# Allegro board AC7K325B.brd
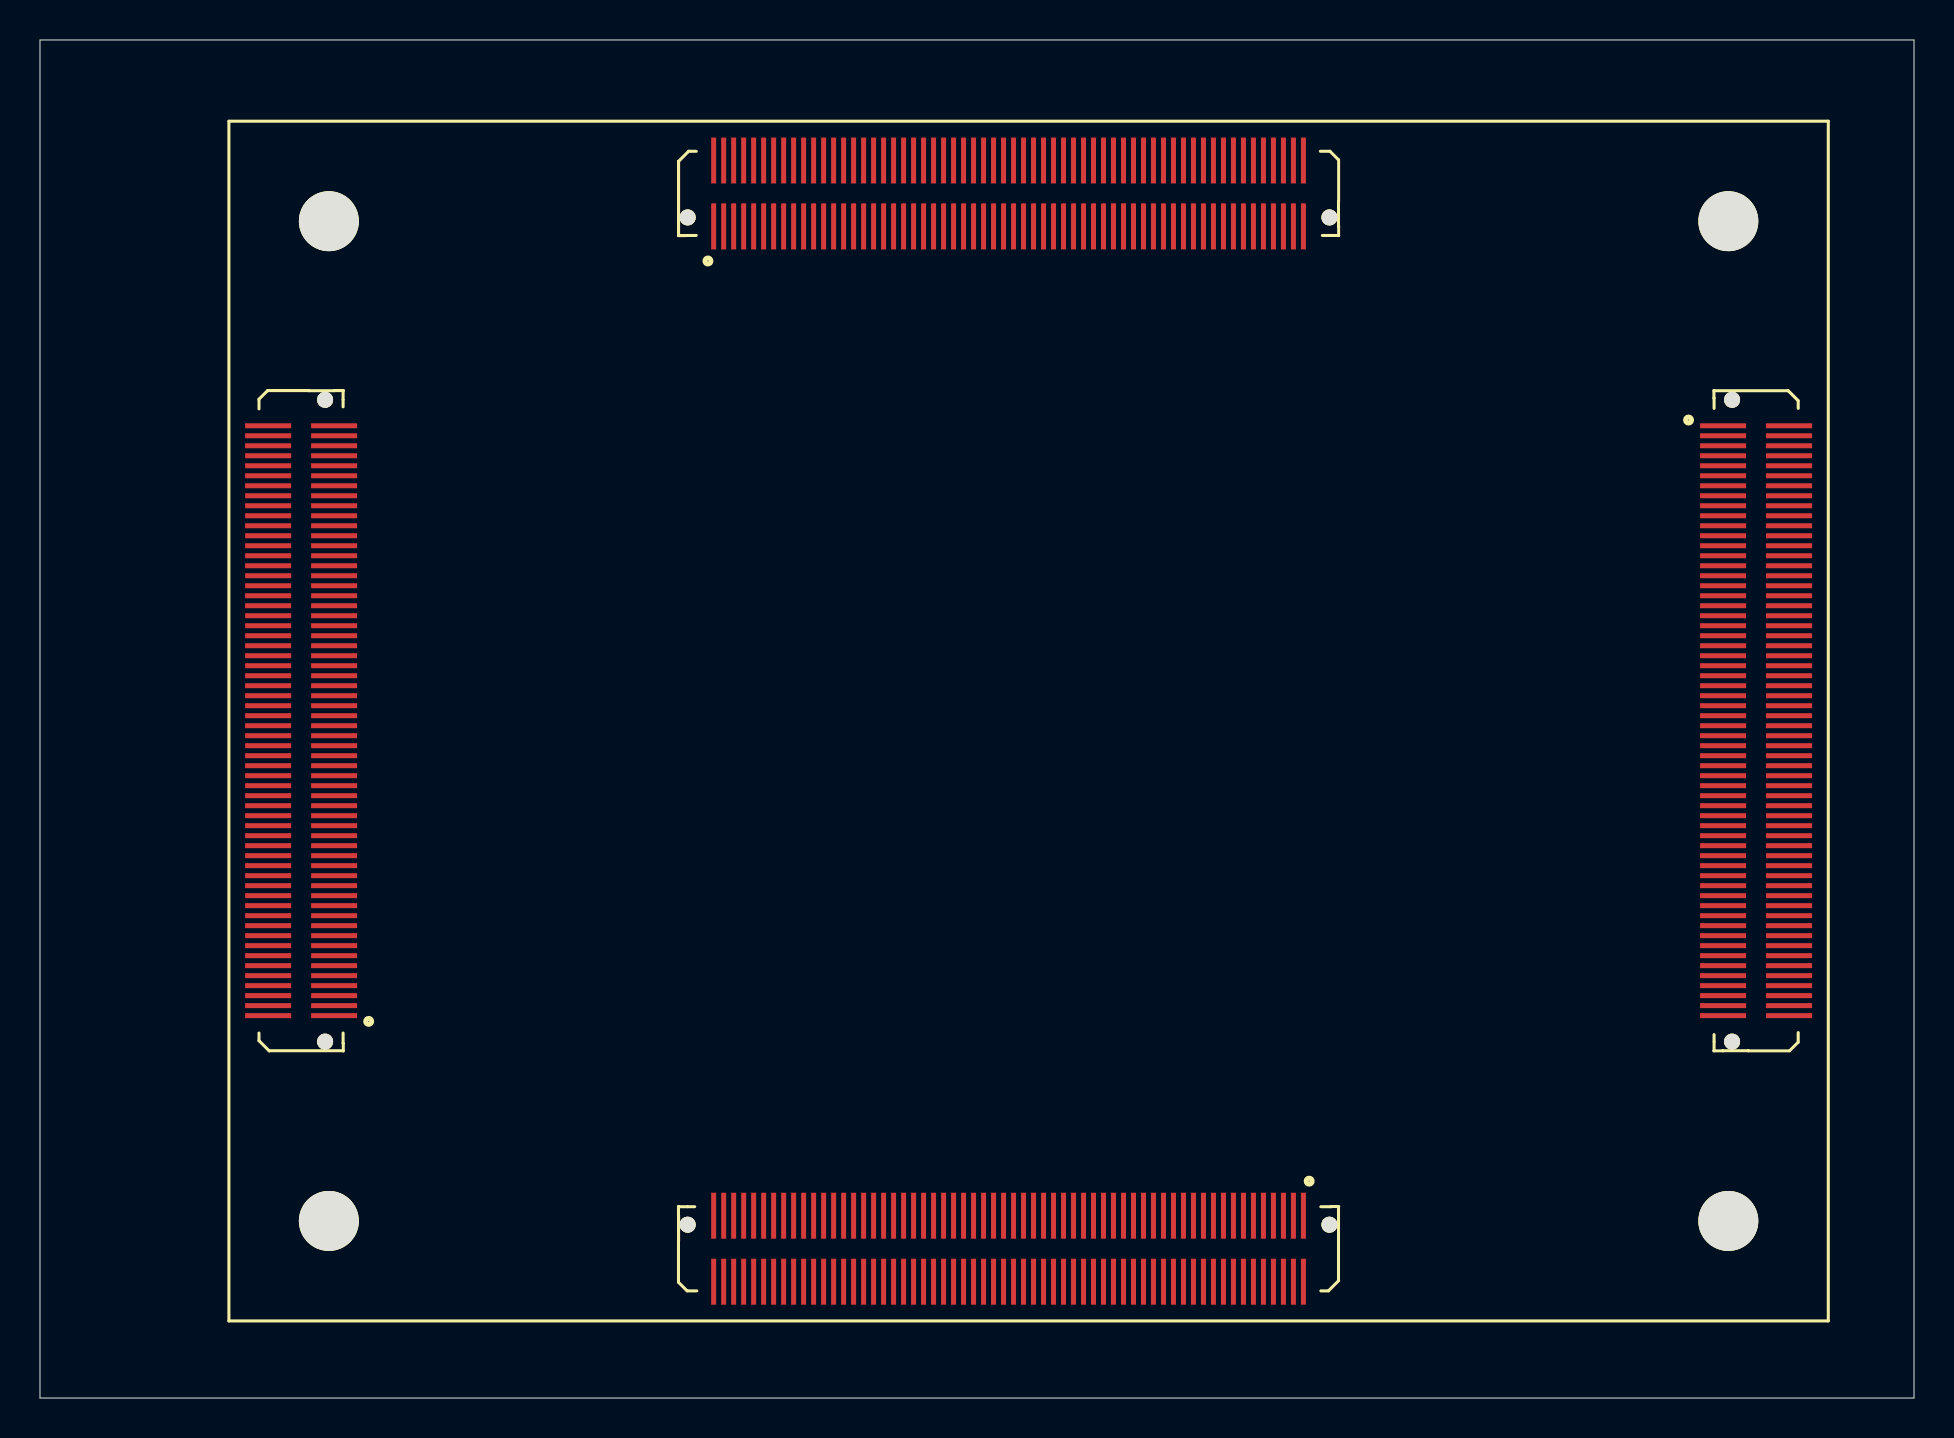
[diagram p0: board, top side]
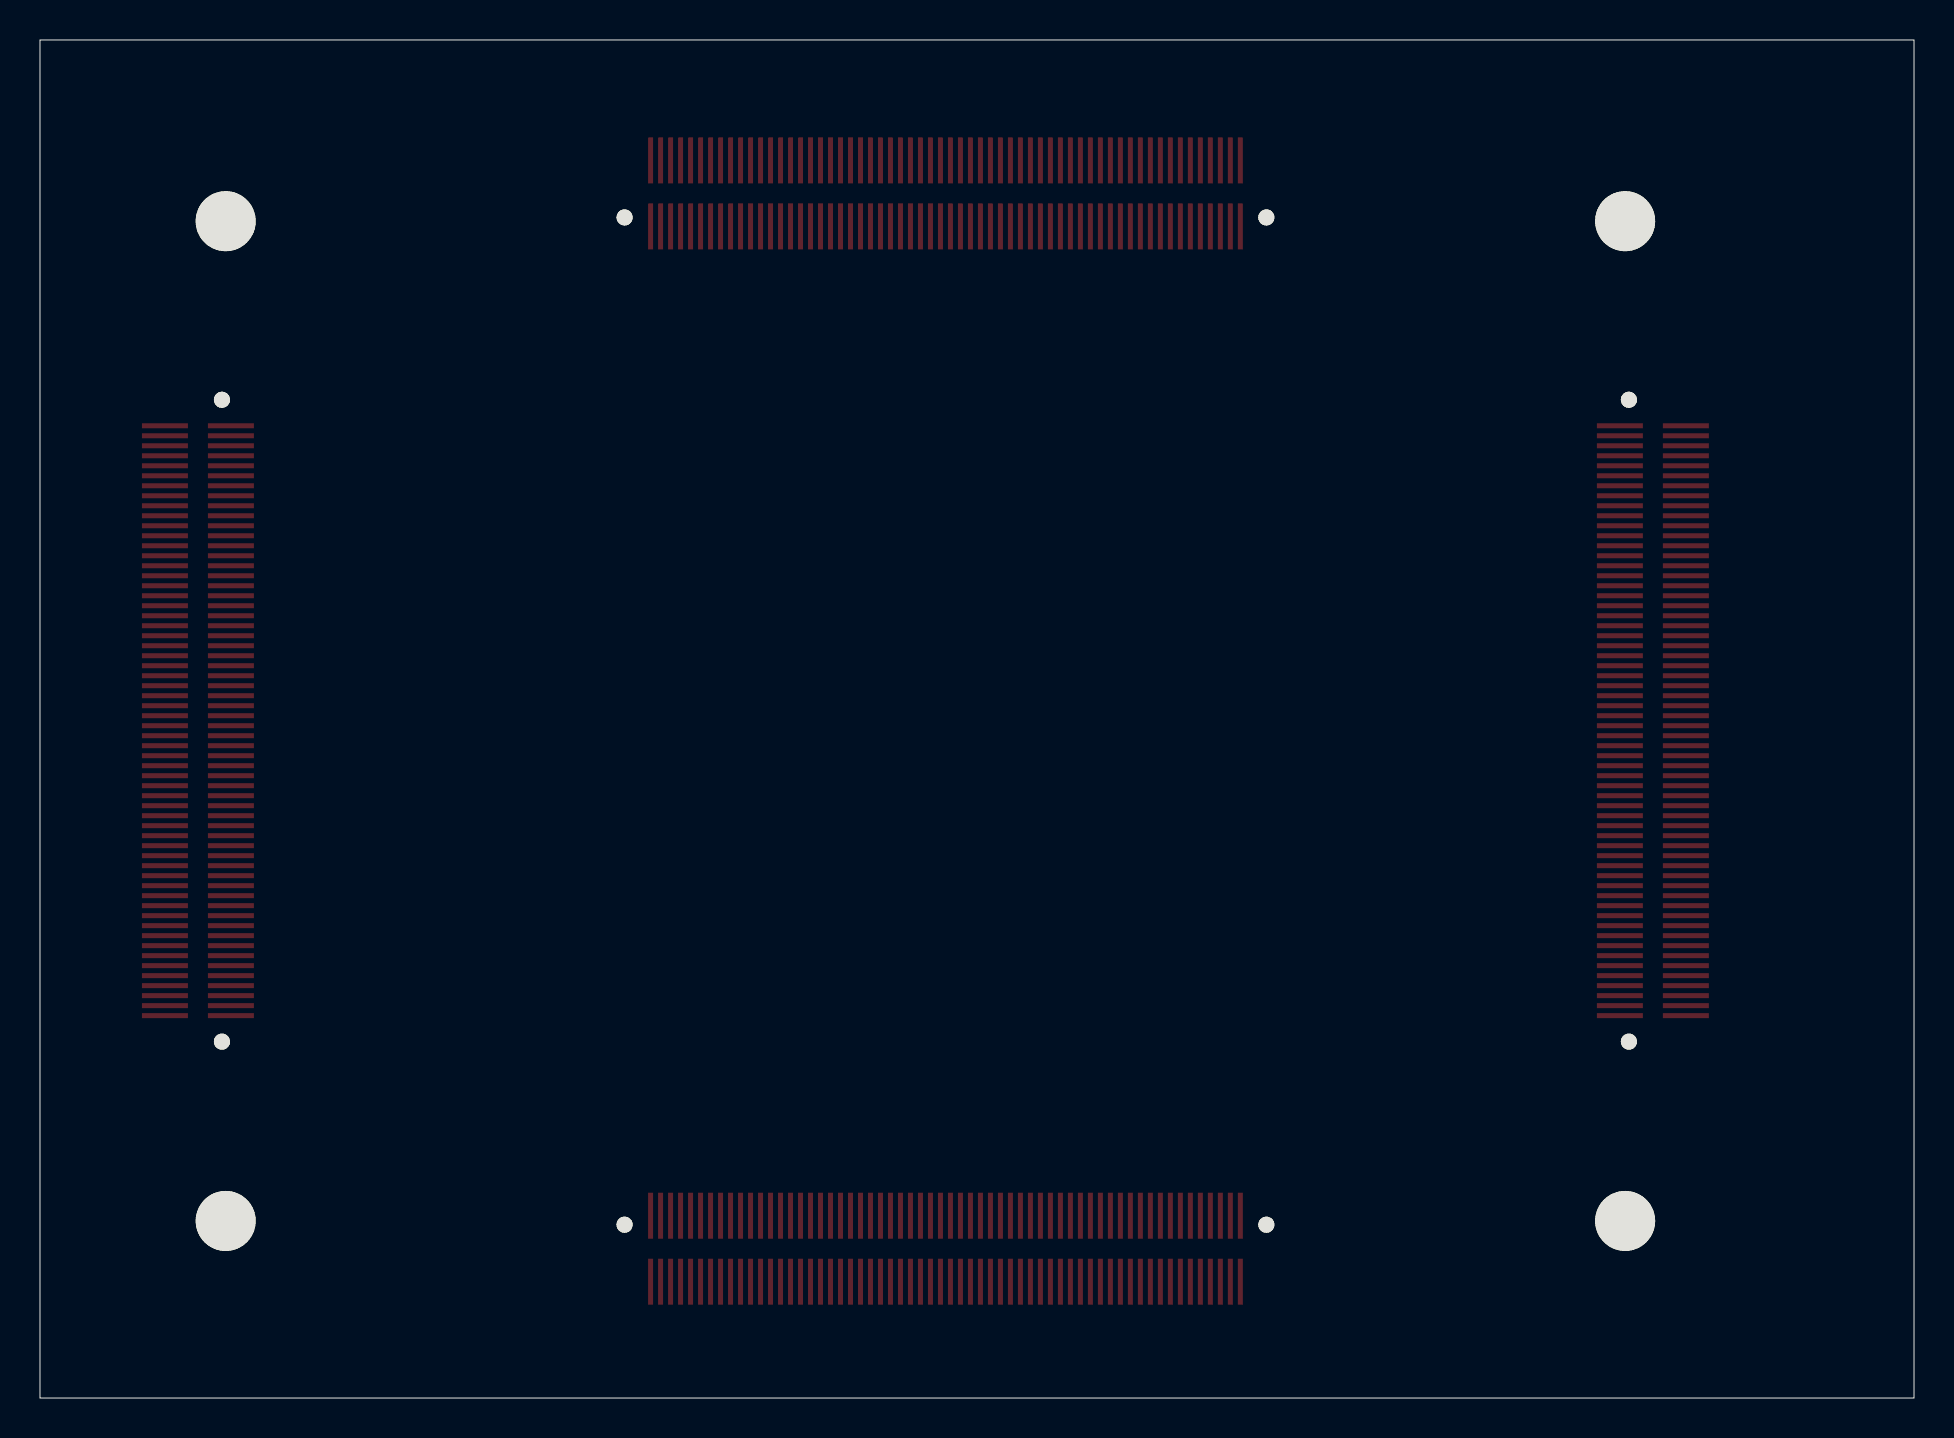
[diagram p1: board, bottom side, seen from below]

Outline 93.74 x 67.92 mm; copper layers: TOP, L2_GND, L3, L4, L5_GND, BOTTOM. Coordinates in mm from the lower left corner of the outline.
Outline path: 0,67.92 0,0 93.74,0 93.74,67.92 0,67.92

## Design rules (mm)
net group BANK116_CLK0_P: nets BANK116_CLK0_N BANK116_CLK0_P
net group BANK117_CLK0_P: nets BANK117_CLK0_N BANK117_CLK0_P
net group BANK118_CLK0_P: nets BANK118_CLK0_N BANK118_CLK0_P
net group HDMI1_RX_0P: nets HDMI1_RX_0N HDMI1_RX_0P
net group HDMI1_RX_1P: nets HDMI1_RX_1N HDMI1_RX_1P
net group HDMI1_RX_2P: nets HDMI1_RX_2N HDMI1_RX_2P
net group HDMI1_RX_CP: nets HDMI1_RX_CN HDMI1_RX_CP
net group HDMI2_RX_0P: nets HDMI2_RX_0N HDMI2_RX_0P
net group HDMI2_RX_1P: nets HDMI2_RX_1N HDMI2_RX_1P
net group HDMI2_RX_2P: nets HDMI2_RX_2N HDMI2_RX_2P
net group HDMI2_RX_CP: nets HDMI2_RX_CN HDMI2_RX_CP
net group IO1_1P: nets IO1_1N IO1_1P
net group IO1_2P: nets IO1_2N IO1_2P
net group N17454101: nets N17454101 N17454103
net group TX1_0P: nets TX1_0N TX1_0P
net group TX1_1P: nets TX1_1N TX1_1P
net group TX1_2P: nets TX1_2N TX1_2P
net group TX1_CP: nets TX1_CN TX1_CP
net group TX2_0P: nets TX2_0N TX2_0P
net group TX2_1P: nets TX2_1N TX2_1P
net group TX2_2P: nets TX2_2N TX2_2P
net group TX2_CP: nets TX2_CN TX2_CP
net group ETH_RX: nets FPGA_TCK FPGA_TDI FPGA_TMS
net group IO1-DIFF: nets B12_L1_N B12_L1_P B12_L2_N B12_L2_P EX_IO1_1N EX_IO1_1P EX_IO1_2N EX_IO1_2P EX_IO1_3N EX_IO1_3P EX_IO1_4N EX_IO1_4P EX_IO1_5N EX_IO1_5P EX_IO1_6N EX_IO1_6P EX_IO1_7N EX_IO1_7P EX_IO1_8N EX_IO1_8P EX_IO1_9N EX_IO1_9P EX_IO1_10N EX_IO1_10P EX_IO1_11N EX_IO1_11P EX_IO1_12N EX_IO1_12P EX_IO1_13N EX_IO1_13P EX_IO1_14N EX_IO1_14P EX_IO1_15N EX_IO1_15P EX_IO1_16N EX_IO1_16P EX_IO1_17N EX_IO1_17P FAN_PWM IO1_3N IO1_3P IO1_4N IO1_4P IO1_5N IO1_5P IO1_6N IO1_6P IO1_7N IO1_7P IO1_8N IO1_8P IO1_9N IO1_9P IO1_10N IO1_10P IO1_11N IO1_11P IO1_12N IO1_12P IO1_15N IO1_15P IO1_16N IO1_16P IO1_17N IO1_17P
net group PCIE: nets N23088557 N23088559 N23088561 N23088563 N23088565 N23088567 N23088569 N23088571 N23088604 N23088606 N23088796 N23088798 N23088830 N23088832 N23088856 N23088858 N23088877 N23088892 PCIE_CLK_N PCIE_CLK_P PCIE_RX0_N PCIE_RX0_P PCIE_RX1_N PCIE_RX1_P PCIE_RX2_N PCIE_RX2_P PCIE_RX3_N PCIE_RX3_P PCIE_RX4_N PCIE_RX4_P PCIE_RX5_N PCIE_RX5_P PCIE_RX6_N PCIE_RX6_P PCIE_RX7_N PCIE_RX7_P PCIE_TX0_N PCIE_TX0_P PCIE_TX1_N PCIE_TX1_P PCIE_TX2_N PCIE_TX2_P PCIE_TX3_N PCIE_TX3_P PCIE_TX4_N PCIE_TX4_P PCIE_TX5_N PCIE_TX5_P PCIE_TX6_N PCIE_TX6_P PCIE_TX7_N PCIE_TX7_P
net group SATA-DIFF: nets SATA1_RX_C_N SATA1_RX_C_P SATA1_RX_N SATA1_RX_P SATA1_TX_C_N SATA1_TX_C_P SATA1_TX_N SATA1_TX_P SATA2_RX_C_N SATA2_RX_C_P SATA2_RX_N SATA2_RX_P SATA2_TX_C_N SATA2_TX_C_P SATA2_TX_N SATA2_TX_P
net group SD_D: nets SD_CLK SD_CMD SD_D0 SD_D1 SD_D2 SD_D3
net group SPF-DIFF: nets SFP1_RX_N SFP1_RX_P SFP1_TX_N SFP1_TX_P SFP2_RX_N SFP2_RX_P SFP2_TX_N SFP2_TX_P SFP3_RX_N SFP3_RX_P SFP3_TX_N SFP3_TX_P SFP4_RX_N SFP4_RX_P SFP4_TX_N SFP4_TX_P
nets with their own width: min track width 0.203; nets GND
nets with their own width: min track width 0.254; nets +3.3V

## Placement (name value [footprint] x y rotation side)
J29  -  [AXK620337YG]  48.45 7.47 180 top
J30  -  [AXK620337YG]  13.06 33.87 90 top
J31  -  [AXK620337YG]  48.45 60.24 0 top
J32  -  [AXK620337YG]  85.84 33.87 270 top
NOREF  -  []  167.03 -9.6 90 top
NOREF#2  -  []  285.34 50.51 0 top
NOREF#3  -  []  -46.84 87.89 0 top
NOREF#4  -  [unnamed#2]  49.45 33.86 180 top

## Library data of the parts
J29-J32 = CONN SOCKET 60x2_0

## Footprints (pads in the part's own frame, mm; a bottom-side part is the same pattern mirrored in y, then rotated)
AXK620337YG
  round 0.8 hole 0.8 unplated: (-16.05,-1.2) (16.05,-1.2)
  rect 0.25x2.3 smd: 1(-14.75,-1.65) 2(-14.75,1.65) 3(-14.25,-1.65) 4(-14.25,1.65) 5(-13.75,-1.65) 6(-13.75,1.65) 7(-13.25,-1.65) 8(-13.25,1.65) 9(-12.75,-1.65) 10(-12.75,1.65) 11(-12.25,-1.65) 12(-12.25,1.65) 13(-11.75,-1.65) 14(-11.75,1.65) 15(-11.25,-1.65) 16(-11.25,1.65) 17(-10.75,-1.65) 18(-10.75,1.65) 19(-10.25,-1.65) 20(-10.25,1.65) 21(-9.75,-1.65) 22(-9.75,1.65) 23(-9.25,-1.65) 24(-9.25,1.65) 25(-8.75,-1.65) 26(-8.75,1.65) 27(-8.25,-1.65) 28(-8.25,1.65) 29(-7.75,-1.65) 30(-7.75,1.65) 31(-7.25,-1.65) 32(-7.25,1.65) 33(-6.75,-1.65) 34(-6.75,1.65) 35(-6.25,-1.65) 36(-6.25,1.65) 37(-5.75,-1.65) 38(-5.75,1.65) 39(-5.25,-1.65) 40(-5.25,1.65) 41(-4.75,-1.65) 42(-4.75,1.65) 43(-4.25,-1.65) 44(-4.25,1.65) 45(-3.75,-1.65) 46(-3.75,1.65) 47(-3.25,-1.65) 48(-3.25,1.65) 49(-2.75,-1.65) 50(-2.75,1.65) 51(-2.25,-1.65) 52(-2.25,1.65) 53(-1.75,-1.65) 54(-1.75,1.65) 55(-1.25,-1.65) 56(-1.25,1.65) 57(-0.75,-1.65) 58(-0.75,1.65) 59(-0.25,-1.65) 60(-0.25,1.65) 61(0.25,-1.65) 62(0.25,1.65) 63(0.75,-1.65) 64(0.75,1.65) 65(1.25,-1.65) 66(1.25,1.65) 67(1.75,-1.65) 68(1.75,1.65) 69(2.25,-1.65) 70(2.25,1.65) 71(2.75,-1.65) 72(2.75,1.65) 73(3.25,-1.65) 74(3.25,1.65) 75(3.75,-1.65) 76(3.75,1.65) 77(4.25,-1.65) 78(4.25,1.65) 79(4.75,-1.65) 80(4.75,1.65) 81(5.25,-1.65) 82(5.25,1.65) 83(5.75,-1.65) 84(5.75,1.65) 85(6.25,-1.65) 86(6.25,1.65) 87(6.75,-1.65) 88(6.75,1.65) 89(7.25,-1.65) 90(7.25,1.65) 91(7.75,-1.65) 92(7.75,1.65) 93(8.25,-1.65) 94(8.25,1.65) 95(8.75,-1.65) 96(8.75,1.65) 97(9.25,-1.65) 98(9.25,1.65) 99(9.75,-1.65) 100(9.75,1.65) 101(10.25,-1.65) 102(10.25,1.65) 103(10.75,-1.65) 104(10.75,1.65) 105(11.25,-1.65) 106(11.25,1.65) 107(11.75,-1.65) 108(11.75,1.65) 109(12.25,-1.65) 110(12.25,1.65) 111(12.75,-1.65) 112(12.75,1.65) 113(13.25,-1.65) 114(13.25,1.65) 115(13.75,-1.65) 116(13.75,1.65) 117(14.25,-1.65) 118(14.25,1.65) 119(14.75,-1.65) 120(14.75,1.65)
unnamed#2
  round 6.35 hole 3 unplated: (-35,25) (-35,-25) (35,25) (35,-25)

## Nets
+5V: J32.111(56) J32.112(116) J32.113(57) J32.114(117) J32.115(58) J32.116(118) J32.117(59) J32.118(119) J32.119(60) J32.120
GND: J29.5(3) J29.6(63) J29.11(6) J29.12(66) J29.17(9) J29.18(69) J29.23(12) J29.24(72) J29.29(15) J29.30(75) J29.35(18) J29.36(78) J29.41(21) J29.42(81) J29.47(24) J29.48(84) J29.53(27) J29.54(87) J29.59(30) J29.60(90) J29.65(33) J29.66(93) J29.71(36) J29.72(96) J29.77(39) J29.78(99) J29.83(42) J29.84(102) J29.89(45) J29.90(105) J29.95(48) J29.96(108) J29.101(51) J29.102(111) J29.107(54) J29.108(114) J29.113(57) J29.114(117) J29.119(60) J29.120 J30.9(5) J30.10(65) J30.19(10) J30.20(70) J30.29(15) J30.30(75) J30.39(20) J30.40(80) J30.49(25) J30.50(85) J30.59(30) J30.60(90) J30.69(35) J30.70(95) J30.79(40) J30.80(100) J30.89(45) J30.90(105) J30.99(50) J30.100(110) J30.109(55) J30.110(115) J30.119(60) J30.120 J31.9(5) J31.10(65) J31.19(10) J31.20(70) J31.29(15) J31.30(75) J31.39(20) J31.40(80) J31.49(25) J31.50(85) J31.59(30) J31.60(90) J31.69(35) J31.70(95) J31.79(40) J31.80(100) J31.89(45) J31.90(105) J31.99(50) J31.100(110) J31.109(55) J31.110(115) J31.119(60) J31.120 J32.9(5) J32.10(65) J32.19(10) J32.20(70) J32.29(15) J32.30(75) J32.39(20) J32.40(80) J32.49(25) J32.50(85) J32.59(30) J32.60(90) J32.69(35) J32.70(95) J32.79(40) J32.80(100) J32.89(45) J32.90(105) J32.99(50) J32.100(110) J32.109(55) J32.110(115)
9136_NRESET: J32.61(31)
9136_TX1_CLK: J30.92(106)
9136_TX1_D0: J30.88(104)
9136_TX1_D1: J30.86(103)
9136_TX1_D2: J30.84(102)
9136_TX1_D3: J30.82(101)
9136_TX1_D4: J30.78(99)
9136_TX1_D5: J30.76(98)
9136_TX1_D6: J30.74(97)
9136_TX1_D7: J30.72(96)
9136_TX1_D8: J30.68(94)
9136_TX1_D9: J30.66(93)
9136_TX1_D10: J30.64(92)
9136_TX1_D11: J30.62(91)
9136_TX1_D12: J30.58(89)
9136_TX1_D13: J30.56(88)
9136_TX1_D14: J30.54(87)
9136_TX1_D15: J30.52(86)
9136_TX1_D16: J30.61(31)
9136_TX1_D17: J30.63(32)
9136_TX1_D18: J30.65(33)
9136_TX1_D19: J30.67(34)
9136_TX1_D20: J30.71(36)
9136_TX1_D21: J30.73(37)
9136_TX1_D22: J30.75(38)
9136_TX1_D23: J30.77(39)
9136_TX1_D24: J30.81(41)
9136_TX1_D25: J30.83(42)
9136_TX1_D26: J30.85(43)
9136_TX1_D27: J30.87(44)
9136_TX1_D28: J30.91(46)
9136_TX1_D29: J30.93(47)
9136_TX1_D30: J30.95(48)
9136_TX1_D31: J30.97(49)
9136_TX1_D32: J30.101(51)
9136_TX1_D33: J30.103(52)
9136_TX1_D34: J30.105(53)
9136_TX1_D35: J30.107(54)
9136_TX1_DE: J30.98(109)
9136_TX1_HS: J30.96(108)
9136_TX1_I2S0: J32.44(82)
9136_TX1_I2S1: J32.46(83)
9136_TX1_I2S2: J32.48(84)
9136_TX1_I2S3: J32.52(86)
9136_TX1_MCLK: J32.36(78)
9136_TX1_SCK: J32.38(79)
9136_TX1_SPDIF: J32.54(87)
9136_TX1_VS: J30.94(107)
9136_TX1_WS: J32.42(81)
9136_TX2_CLK: J30.42(81)
9136_TX2_D0: J30.38(79)
9136_TX2_D1: J30.36(78)
9136_TX2_D2: J30.34(77)
9136_TX2_D3: J30.32(76)
9136_TX2_D4: J30.28(74)
9136_TX2_D5: J30.26(73)
9136_TX2_D6: J30.24(72)
9136_TX2_D7: J30.22(71)
9136_TX2_D8: J30.18(69)
9136_TX2_D9: J30.16(68)
9136_TX2_D10: J30.14(67)
9136_TX2_D11: J30.12(66)
9136_TX2_D12: J30.8(64)
9136_TX2_D13: J30.6(63)
9136_TX2_D14: J30.4(62)
9136_TX2_D15: J30.2(61)
9136_TX2_D16: J30.1
9136_TX2_D17: J30.3(2)
9136_TX2_D18: J30.5(3)
9136_TX2_D19: J30.7(4)
9136_TX2_D20: J30.11(6)
9136_TX2_D21: J30.13(7)
9136_TX2_D22: J30.15(8)
9136_TX2_D23: J30.17(9)
9136_TX2_D24: J30.21(11)
9136_TX2_D25: J30.23(12)
9136_TX2_D26: J30.25(13)
9136_TX2_D27: J30.27(14)
9136_TX2_D28: J30.31(16)
9136_TX2_D29: J30.33(17)
9136_TX2_D30: J30.35(18)
9136_TX2_D31: J30.37(19)
9136_TX2_D32: J30.41(21)
9136_TX2_D33: J30.43(22)
9136_TX2_D34: J30.45(23)
9136_TX2_D35: J30.47(24)
9136_TX2_DE: J30.48(84)
9136_TX2_HS: J30.46(83)
9136_TX2_I2S0: J32.47(24)
9136_TX2_I2S1: J32.51(26)
9136_TX2_I2S2: J32.53(27)
9136_TX2_I2S3: J32.55(28)
9136_TX2_MCLK: J32.41(21)
9136_TX2_SCK: J32.43(22)
9136_TX2_SPDIF: J32.57(29)
9136_TX2_VS: J30.44(82)
9136_TX2_WS: J32.45(23)
B12_L1_N: J32.84(102)
B12_L1_P: J32.82(101)
B12_L2_N: J32.88(104)
B12_L2_P: J32.86(103)
BANK116_CLK0_N: J29.55(28)
BANK116_CLK0_P: J29.57(29)
BANK117_CLK0_N: J29.109(55)
BANK117_CLK0_P: J29.111(56)
BANK118_CLK0_N: J29.110(115)
BANK118_CLK0_P: J29.112(116)
BANK118_RX2_N: J29.92(106)
BANK118_RX2_P: J29.94(107)
BANK118_RX3_N: J29.104(112)
BANK118_RX3_P: J29.106(113)
BANK118_TX2_N: J29.86(103)
BANK118_TX2_P: J29.88(104)
BANK118_TX3_N: J29.98(109)
BANK118_TX3_P: J29.100(110)
FAN_PWM: J32.2(61)
FPGA_TCK: J30.112(116)
FPGA_TDI: J30.118(119)
FPGA_TDO: J30.116(118)
FPGA_TMS: J30.114(117)
HDMI1_IN_AP0: J31.52(86)
HDMI1_IN_AP1: J31.54(87)
HDMI1_IN_AP2: J31.56(88)
HDMI1_IN_AP3: J31.58(89)
HDMI1_IN_AP4: J32.11(6)
HDMI1_IN_AP5: J32.15(8)
HDMI1_IN_D0: J32.7(4)
HDMI1_IN_D1: J31.118(119)
HDMI1_IN_D2: J31.116(118)
HDMI1_IN_D3: J31.114(117)
HDMI1_IN_D4: J31.112(116)
HDMI1_IN_D5: J31.108(114)
HDMI1_IN_D6: J31.106(113)
HDMI1_IN_D7: J31.104(112)
HDMI1_IN_D8: J31.102(111)
HDMI1_IN_D9: J31.98(109)
HDMI1_IN_D10: J31.96(108)
HDMI1_IN_D11: J31.94(107)
HDMI1_IN_D12: J31.92(106)
HDMI1_IN_D13: J31.88(104)
HDMI1_IN_D14: J31.86(103)
HDMI1_IN_D15: J31.84(102)
HDMI1_IN_D16: J31.82(101)
HDMI1_IN_D17: J31.78(99)
HDMI1_IN_D18: J31.76(98)
HDMI1_IN_D19: J31.74(97)
HDMI1_IN_D20: J31.72(96)
HDMI1_IN_D21: J31.68(94)
HDMI1_IN_D22: J31.66(93)
HDMI1_IN_D23: J31.64(92)
HDMI1_IN_D24: J31.62(91)
HDMI1_IN_D25: J31.117(59)
HDMI1_IN_D26: J31.115(58)
HDMI1_IN_D27: J31.111(56)
HDMI1_IN_D28: J31.107(54)
HDMI1_IN_D29: J31.105(53)
HDMI1_IN_D30: J31.103(52)
HDMI1_IN_D31: J31.101(51)
HDMI1_IN_D32: J31.97(49)
HDMI1_IN_D33: J31.95(48)
HDMI1_IN_D34: J31.93(47)
HDMI1_IN_D35: J31.91(46)
HDMI1_IN_D36: J31.87(44)
HDMI1_IN_D37: J31.85(43)
HDMI1_IN_D38: J31.83(42)
HDMI1_IN_D39: J31.81(41)
HDMI1_IN_D40: J31.77(39)
HDMI1_IN_D41: J31.75(38)
HDMI1_IN_D42: J31.73(37)
HDMI1_IN_D43: J31.71(36)
HDMI1_IN_D44: J31.67(34)
HDMI1_IN_D45: J31.65(33)
HDMI1_IN_D46: J31.63(32)
HDMI1_IN_D47: J31.61(31)
HDMI1_IN_DE: J32.5(3)
HDMI1_IN_DSCL: J30.55(28)
HDMI1_IN_DSDA: J30.57(29)
HDMI1_IN_HS: J32.3(2)
HDMI1_IN_MCLK: J32.17(9)
HDMI1_IN_PCLK: J31.113(57)
HDMI1_IN_SCK: J32.13(7)
HDMI1_IN_VS: J32.1
HDMI1_SCL: J32.26(73)
HDMI1_SDA: J32.28(74)
HDMI2_IN_AP0: J32.21(11)
HDMI2_IN_AP1: J32.23(12)
HDMI2_IN_AP2: J32.25(13)
HDMI2_IN_AP3: J32.27(14)
HDMI2_IN_AP4: J32.31(16)
HDMI2_IN_AP5: J32.35(18)
HDMI2_IN_D0: J31.2(61)
HDMI2_IN_D1: J31.1
HDMI2_IN_D2: J31.3(2)
HDMI2_IN_D3: J31.5(3)
HDMI2_IN_D4: J31.7(4)
HDMI2_IN_D5: J31.11(6)
HDMI2_IN_D6: J31.13(7)
HDMI2_IN_D7: J31.15(8)
HDMI2_IN_D8: J31.17(9)
HDMI2_IN_D9: J31.21(11)
HDMI2_IN_D10: J31.23(12)
HDMI2_IN_D11: J31.25(13)
HDMI2_IN_D12: J31.27(14)
HDMI2_IN_D13: J31.31(16)
HDMI2_IN_D14: J31.33(17)
HDMI2_IN_D15: J31.35(18)
HDMI2_IN_D16: J31.37(19)
HDMI2_IN_D17: J31.41(21)
HDMI2_IN_D18: J31.43(22)
HDMI2_IN_D19: J31.45(23)
HDMI2_IN_D20: J31.47(24)
HDMI2_IN_D21: J31.51(26)
HDMI2_IN_D22: J31.53(27)
HDMI2_IN_D23: J31.55(28)
HDMI2_IN_D24: J31.57(29)
HDMI2_IN_D25: J31.12(66)
HDMI2_IN_D26: J31.14(67)
HDMI2_IN_D27: J31.16(68)
HDMI2_IN_D28: J31.18(69)
HDMI2_IN_D29: J31.22(71)
HDMI2_IN_D30: J31.26(73)
HDMI2_IN_D31: J31.28(74)
HDMI2_IN_D32: J31.32(76)
HDMI2_IN_D33: J31.34(77)
HDMI2_IN_D34: J31.36(78)
HDMI2_IN_D35: J31.38(79)
HDMI2_IN_D36: J31.42(81)
HDMI2_IN_D37: J31.44(82)
HDMI2_IN_D38: J31.46(83)
HDMI2_IN_D39: J31.48(84)
HDMI2_IN_D40: J30.117(59)
HDMI2_IN_D41: J30.115(58)
HDMI2_IN_D42: J30.113(57)
HDMI2_IN_D43: J30.111(56)
HDMI2_IN_D44: J30.108(114)
HDMI2_IN_D45: J30.106(113)
HDMI2_IN_D46: J30.104(112)
HDMI2_IN_D47: J30.102(111)
HDMI2_IN_DE: J31.4(62)
HDMI2_IN_DSCL: J30.51(26)
HDMI2_IN_DSDA: J30.53(27)
HDMI2_IN_HS: J31.6(63)
HDMI2_IN_MCLK: J32.37(19)
HDMI2_IN_PCLK: J31.24(72)
HDMI2_IN_SCK: J32.33(17)
HDMI2_IN_VS: J31.8(64)
HDMI2_SCL: J32.32(76)
HDMI2_SDA: J32.34(77)
HDMI_IN_RESET: J32.24(72)
I2C_SCL: J32.63(32)
I2C_SDA: J32.65(33)
IO1_1N: J32.107(54)
IO1_1P: J32.105(53)
IO1_2N: J32.103(52)
IO1_2P: J32.101(51)
IO1_3N: J32.97(49)
IO1_3P: J32.95(48)
IO1_4N: J32.93(47)
IO1_4P: J32.91(46)
IO1_5N: J32.87(44)
IO1_5P: J32.85(43)
IO1_6N: J32.83(42)
IO1_6P: J32.81(41)
IO1_7N: J32.77(39)
IO1_7P: J32.75(38)
IO1_8N: J32.73(37)
IO1_8P: J32.71(36)
IO1_9N: J32.108(114)
IO1_9P: J32.106(113)
IO1_10N: J32.104(112)
IO1_10P: J32.102(111)
IO1_11N: J32.98(109)
IO1_11P: J32.96(108)
IO1_12N: J32.94(107)
IO1_12P: J32.92(106)
IO1_15N: J32.78(99)
IO1_15P: J32.76(98)
IO1_16N: J32.74(97)
IO1_16P: J32.72(96)
IO1_17N: J32.68(94)
IO1_17P: J32.66(93)
KEY1: J32.62(91)
KEY2: J32.64(92)
LED1: J32.58(89)
LED2: J32.56(88)
PCIE_CLK_N: J29.25(13)
PCIE_CLK_P: J29.27(14)
PCIE_PERST: J32.67(34)
PCIE_RX0_N: J29.50(85)
PCIE_RX0_P: J29.52(86)
PCIE_RX1_N: J29.44(82)
PCIE_RX1_P: J29.46(83)
PCIE_RX2_N: J29.38(79)
PCIE_RX2_P: J29.40(80)
PCIE_RX3_N: J29.32(76)
PCIE_RX3_P: J29.34(77)
PCIE_RX4_N: J29.20(70)
PCIE_RX4_P: J29.22(71)
PCIE_RX5_N: J29.14(67)
PCIE_RX5_P: J29.16(68)
PCIE_RX6_N: J29.8(64)
PCIE_RX6_P: J29.10(65)
PCIE_RX7_N: J29.2(61)
PCIE_RX7_P: J29.4(62)
PCIE_TX0_N: J29.49(25)
PCIE_TX0_P: J29.51(26)
PCIE_TX1_N: J29.43(22)
PCIE_TX1_P: J29.45(23)
PCIE_TX2_N: J29.37(19)
PCIE_TX2_P: J29.39(20)
PCIE_TX3_N: J29.31(16)
PCIE_TX3_P: J29.33(17)
PCIE_TX4_N: J29.19(10)
PCIE_TX4_P: J29.21(11)
PCIE_TX5_N: J29.13(7)
PCIE_TX5_P: J29.15(8)
PCIE_TX6_N: J29.7(4)
PCIE_TX6_P: J29.9(5)
PCIE_TX7_N: J29.1
PCIE_TX7_P: J29.3(2)
SATA1_RX_N: J29.80(100)
SATA1_RX_P: J29.82(101)
SATA1_TX_N: J29.74(97)
SATA1_TX_P: J29.76(98)
SATA2_RX_N: J29.68(94)
SATA2_RX_P: J29.70(95)
SATA2_TX_N: J29.62(91)
SATA2_TX_P: J29.64(92)
SD_CLK: J32.12(66)
SD_CMD: J32.16(68)
SD_D0: J32.4(62)
SD_D1: J32.6(63)
SD_D2: J32.8(64)
SD_D3: J32.14(67)
SFP1_RX_N: J29.67(34)
SFP1_RX_P: J29.69(35)
SFP1_TX_N: J29.61(31)
SFP1_TX_P: J29.63(32)
SFP2_RX_N: J29.79(40)
SFP2_RX_P: J29.81(41)
SFP2_TX_N: J29.73(37)
SFP2_TX_P: J29.75(38)
SFP3_RX_N: J29.91(46)
SFP3_RX_P: J29.93(47)
SFP3_TX_N: J29.85(43)
SFP3_TX_P: J29.87(44)
SFP4_RX_N: J29.103(52)
SFP4_RX_P: J29.105(53)
SFP4_TX_N: J29.97(49)
SFP4_TX_P: J29.99(50)
UART_RXD: J32.18(69)
UART_TXD: J32.22(71)

Pads without a net: J29 26 28 56 58 115 116 117 118

## Text on the board
User.12: L1 | L2 | L3 | L4 | L5 | L6 | (GND) | SINGLE ENDED | 50ohm | WIDTH | 4.5mil | 4mil | (WIDTH/SPACE) | 3.5mil/6mil | DIFF-PAIR | 4mil/7mil | 100ohm | 6.1mil/4.9mil | 90ohm | 10.CONTROLLED IMPENDANCE 50 OHM +/-10% | 6.TOLERANCE: HOLES DIAMETER {NPTH} +/-0.003" | 7.LINE WIDTH/SPACING: +/-20% | 8.ALL VIAS ARE TENTED | 9.CONTROLLED DIFFERENTAIL IMPEDANCE 100 OHM +/-10% | {EDGE TO EDGE/CENTRE TO EDGE} +/-0.005" | LINE WITH IMPEDANCE CHART FOR REFERENCE | HOLES {CENTRE TO CENTRE} +/-0.003" | OUTLINE {DATUM TO HOLES} +/-0.003" | {DATUM TO EDGE} +/-0.005" | LAYER 1      L1 TOP | LAYER 2      L2 GND | LAYER 3      L3 INNER | LAYER 4      L4 INNER | LAYER 5      L5 GND | LAYER 6      L6 BOTTOM | GOLD 0.05um MINIMUM | TOP SIDE | {PTH} +/-0.003" | 0.333oz | 1oz
User.45: FIGURE | SIZE | 8.0 | 29.13 | 35.0 | 35.04 | 36.0 | 39.37 | 42.0 | 47.24 | 62.0 | 125.0 | 31.5 | 118.11 | 55.12x31.5 | 62.0x39.37 | 94.49x31.5 | 102.36x31.5 | DRILL CHART | ALL UNITS ARE IN MILS | TOLERANCE | +3.0/-3.0 | PLATED | NON-PLATED | QTY | 1372 | 14 | 40 | 10 | 2 | 6 | 20 | 4 | 8 | 1
